# EAGLE board LED_RGB (EAGLE 7.2.0)
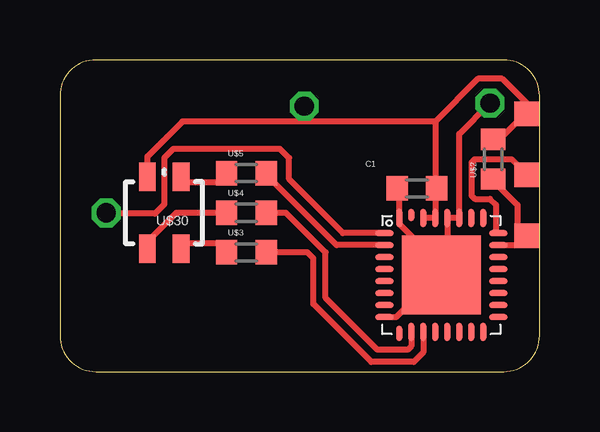
[diagram p0: board, top side]
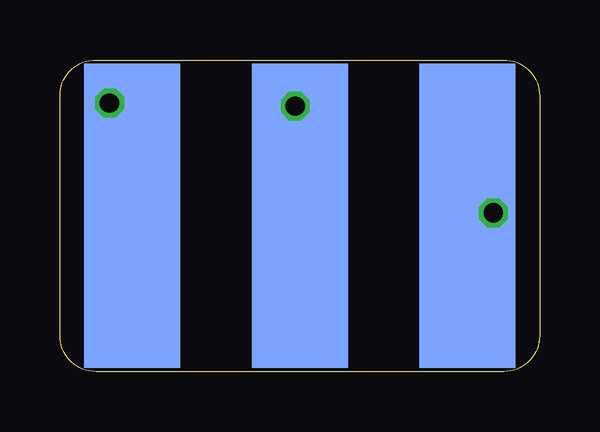
[diagram p1: board, bottom side, seen from below]

Size 20 x 13 mm. Coordinates in mm from the lower left corner, seen from the top.
Copper layers (1*16): Top 0.035mm / dielectric 1.5mm / Bottom 0.035mm
Design rules "Bilex DRU *": minimum track width 10mil, minimum drill 24mil, track to track 10mil, track to pad 10mil, pad to pad 10mil, via to via 10mil, smd to smd 10mil, copper to edge 1mil, drill to drill 8mil, minimum pad ring 10mil, minimum via ring 8mil, stop-mask expansion 4mil, vias tented up to drill 0mil, thermal gap 10mil

## Footprints (pad centres in the part's own frame; a part is rotated, then mirrored left to right if it is on the bottom)
603 = smd 0.889 x 1.016: 1 -0.826,0; 2 0.826,0
CARRIER_SMD2_3POL = smd 4 x 12.7 bottom: GND -6.985,0; RX/TX 6.985,0; VCC 0,0 | smd 1.016 x 1.016: RST -9.461,0.826; TST -9.461,-1.714; VCC'' -9.461,-4.255
QFN32 = smd 0.762 x 0.254: 1 -2.375,1.75; 2 -2.375,1.25; 3 -2.375,0.75; 4 -2.375,0.25; 5 -2.375,-0.25; 6 -2.375,-0.75; 7 -2.375,-1.25; 8 -2.375,-1.75; 17 2.375,-1.75; 18 2.375,-1.25; 19 2.375,-0.75; 20 2.375,-0.25; 21 2.375,0.25; 22 2.375,0.75; 23 2.375,1.25; 24 2.375,1.75 | smd 0.254 x 0.635: 9 -1.75,-2.438 | smd 0.254 x 0.762: 10 -1.25,-2.375; 11 -0.75,-2.375; 12 -0.25,-2.375; 13 0.25,-2.375; 14 0.75,-2.375; 15 1.25,-2.375; 16 1.75,-2.375; 25 1.75,2.375; 26 1.25,2.375; 27 0.75,2.375; 28 0.25,2.375; 29 -0.25,2.375; 30 -0.75,2.375; 32 -1.75,2.375 | smd 0.254 x 0.508: 31 -1.25,2.5 | smd 3.302 x 3.302: TP 0,0
LED-TRICOLOR-SMD = smd 0.7 x 1.2: A 0.7,-1.5; B 0.7,1.5; G -0.7,1.5; R -0.7,-1.5

## Placement (x,y rotation side)
C1  100n  [603]  14.89,7.64 180 top
U$1  CARRIER_SMD2SMD2_3POL  [CARRIER_SMD2_3POL]  10,6.5 180 top
U$2  10k  [603]  18.06,8.86 90 top
U$3  150  [603]  7.78,4.97 0 top
U$4  150  [603]  7.78,6.62 0 top
U$5  150  [603]  7.78,8.28 0 top
U$10  MSP430G2553  [QFN32]  15.9,4.03 0 top
U$30  LED-TRICOLOR  [LED-TRICOLOR-SMD]  4.35,6.62 180 top

## Library data of the parts
C1 U$1-U$5 U$10 = thar
U$30 = SparkFun-LED

## Nets
GND: C1.2 U$1.GND U$10.8 U$10.27 U$10.28 U$10.32 U$10.TP
N$2: U$3.1 U$30.G
N$3: U$1.TST U$10.24
N$4: U$1.RST U$2.1 U$10.23
N$5: U$4.1 U$30.B
N$6: U$5.1 U$30.R
N$7: U$4.2 U$10.10
N$11: U$5.2 U$10.2
N$12: U$1.RX/TX U$10.1
N$13: U$3.2 U$10.11
VCC: C1.1 U$1.VCC U$1.VCC'' U$2.2 U$10.29 U$10.30 U$30.A

## Tracks (layer width: path | path; a pad name or v marks a point on that pad's centre or on a via)
GND  (via drill 0.8)
  Top 0.254: 16.43,4.35 16.19,5.38 16.16,5.35 | 16.43,4.35 16.48,3.06 U$10.TP 15.01,2.94 14.89,3.14 14.03,2.28 U$10.8 | 16.15,4.72 U$10.28 U$10.27 16.65,9.91 v17.93,11.2 | 16.15,4.72 16.15,4.42 16.43,4.35 | 16.15,4.72 15.52,5.35 14.76,5.55 14.15,6.16 U$10.32 14.15,7.36 14.12,7.46 14.12,7.7 C1.2 14.19,7.77
  Bottom 0.254: 18,6.5 17.93,6.57 v17.93,11.2 16.98,10.25 U$1.GND
N$2
  Top 0.254: U$3.1 6.95,5.29 6.89,5.35 5.28,5.35 U$30.G
N$3
  Top 0.254: 19.61,7.88 19.46,8.02 19.5,8.18 U$1.TST | U$10.24 18.19,5.78 18.19,6.95 17.93,7.21 17.3,7.21 17.17,7.33 17.17,8.73 17.3,8.86 18.82,8.86 19.43,8.25 U$1.TST | U$1.TST
N$4
  Top 0.254: 19.46,5.48 19.5,5.38 | 19.46,5.48 19.48,5.6 | 19.48,5.6 19.5,5.69 19.08,5.74 19.08,6.95 18.06,7.97 U$2.1 | U$10.23 19.28,5.28 19.46,5.48 | U$1.RST 19.46,5.62 19.48,5.6
N$5
  Top 0.254: U$4.1 4.85,6.62 3.71,5.48 3.71,5.19 U$30.B
N$6
  Top 0.254: U$5.1 6.89,8.21 6.89,7.89 5.28,7.89 U$30.R
N$7
  Top 0.254: U$10.10 14.65,1.06 14.51,0.91 13.24,0.91 11.08,3.07 11.08,4.97 9.43,6.62 U$4.2
N$11
  Top 0.254: U$10.2 11.53,5.28 8.6,8.21 U$5.2
N$12  (via drill 0.8)
  Top 0.254: U$10.1 11.79,5.78 9.55,8.02 9.55,8.91 9.17,9.29 4.73,9.29 4.35,8.91 4.35,6.98 3.96,6.59 1.96,6.59 v1.93,6.62
  Bottom 0.254: 4.79,6.25 v1.93,6.62 2.06,6.5 U$1.RX/TX
N$13
  Top 0.254: U$10.11 15.15,0.79 14.76,0.4 12.98,0.4 10.57,2.81 10.57,4.72 10.31,4.97 U$3.2
VCC  (via drill 0.8)
  Top 0.254: U$10.29 | 15.65,10.43 15.65,8.02 | 15.65,8.02 U$10.29 | 15.78,7.77 15.71,8.02 | 15.71,8.02 15.65,8.02 | U$10.29 U$10.30 | C1.1 15.71,8.02 | 19.5,10.52 19.46,10.56 | U$2.2 18.12,9.48 19.2,10.56 19.2,10.51 19.46,10.56 | 19.46,10.56 19.65,10.75 19.65,11.01 18.44,12.21 17.43,12.21 15.65,10.43 | 15.65,10.43 10.19,10.43 | 10.19,10.43 5.11,10.43 3.65,8.97 U$30.A | 19.46,10.56 U$1.VCC'' | v10.19,11.07 10.19,10.43
  Bottom 0.254: U$1.VCC 10,10.88 v10.19,11.07